# EAGLE board RGB_Tester (EAGLE 8.0.1)
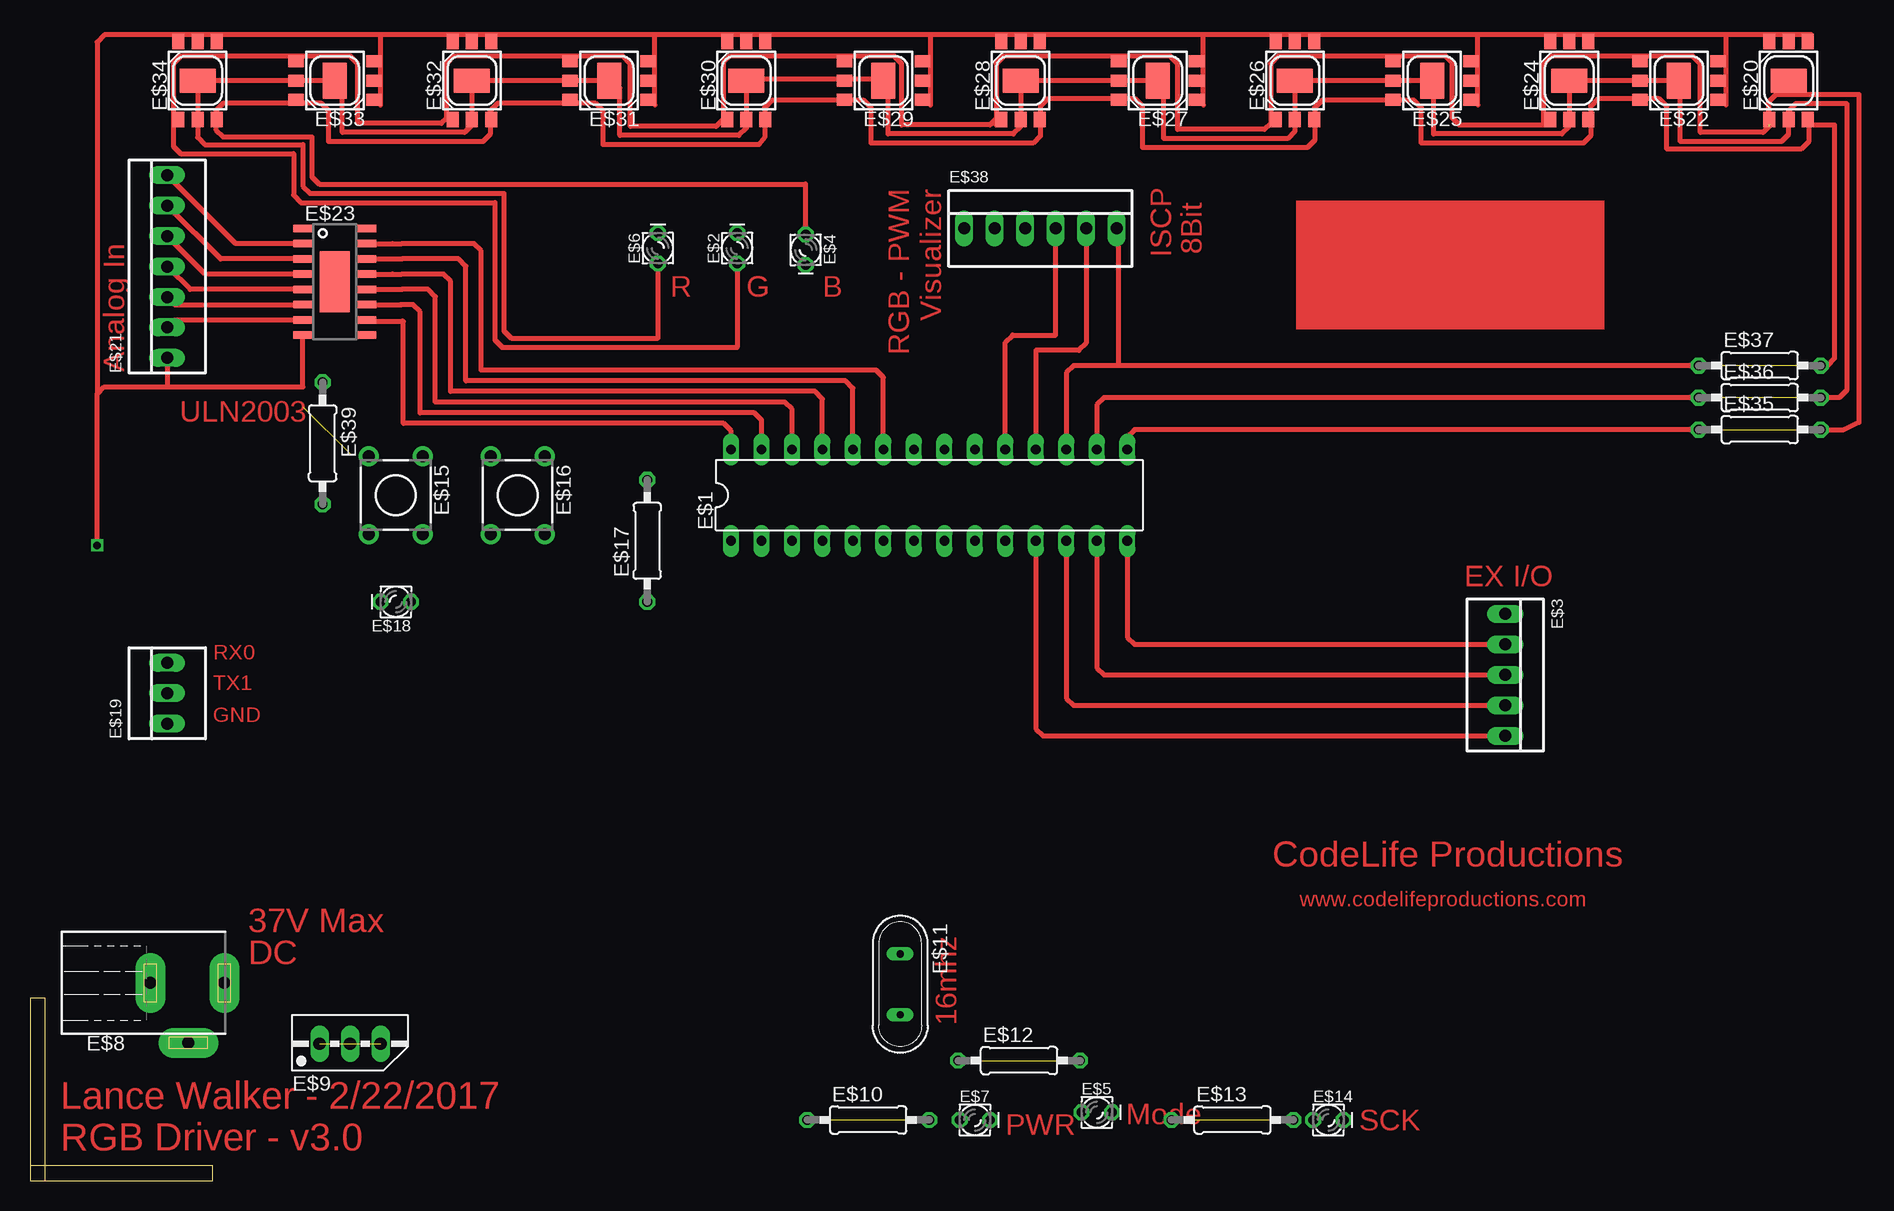
[diagram p0: board, top side]
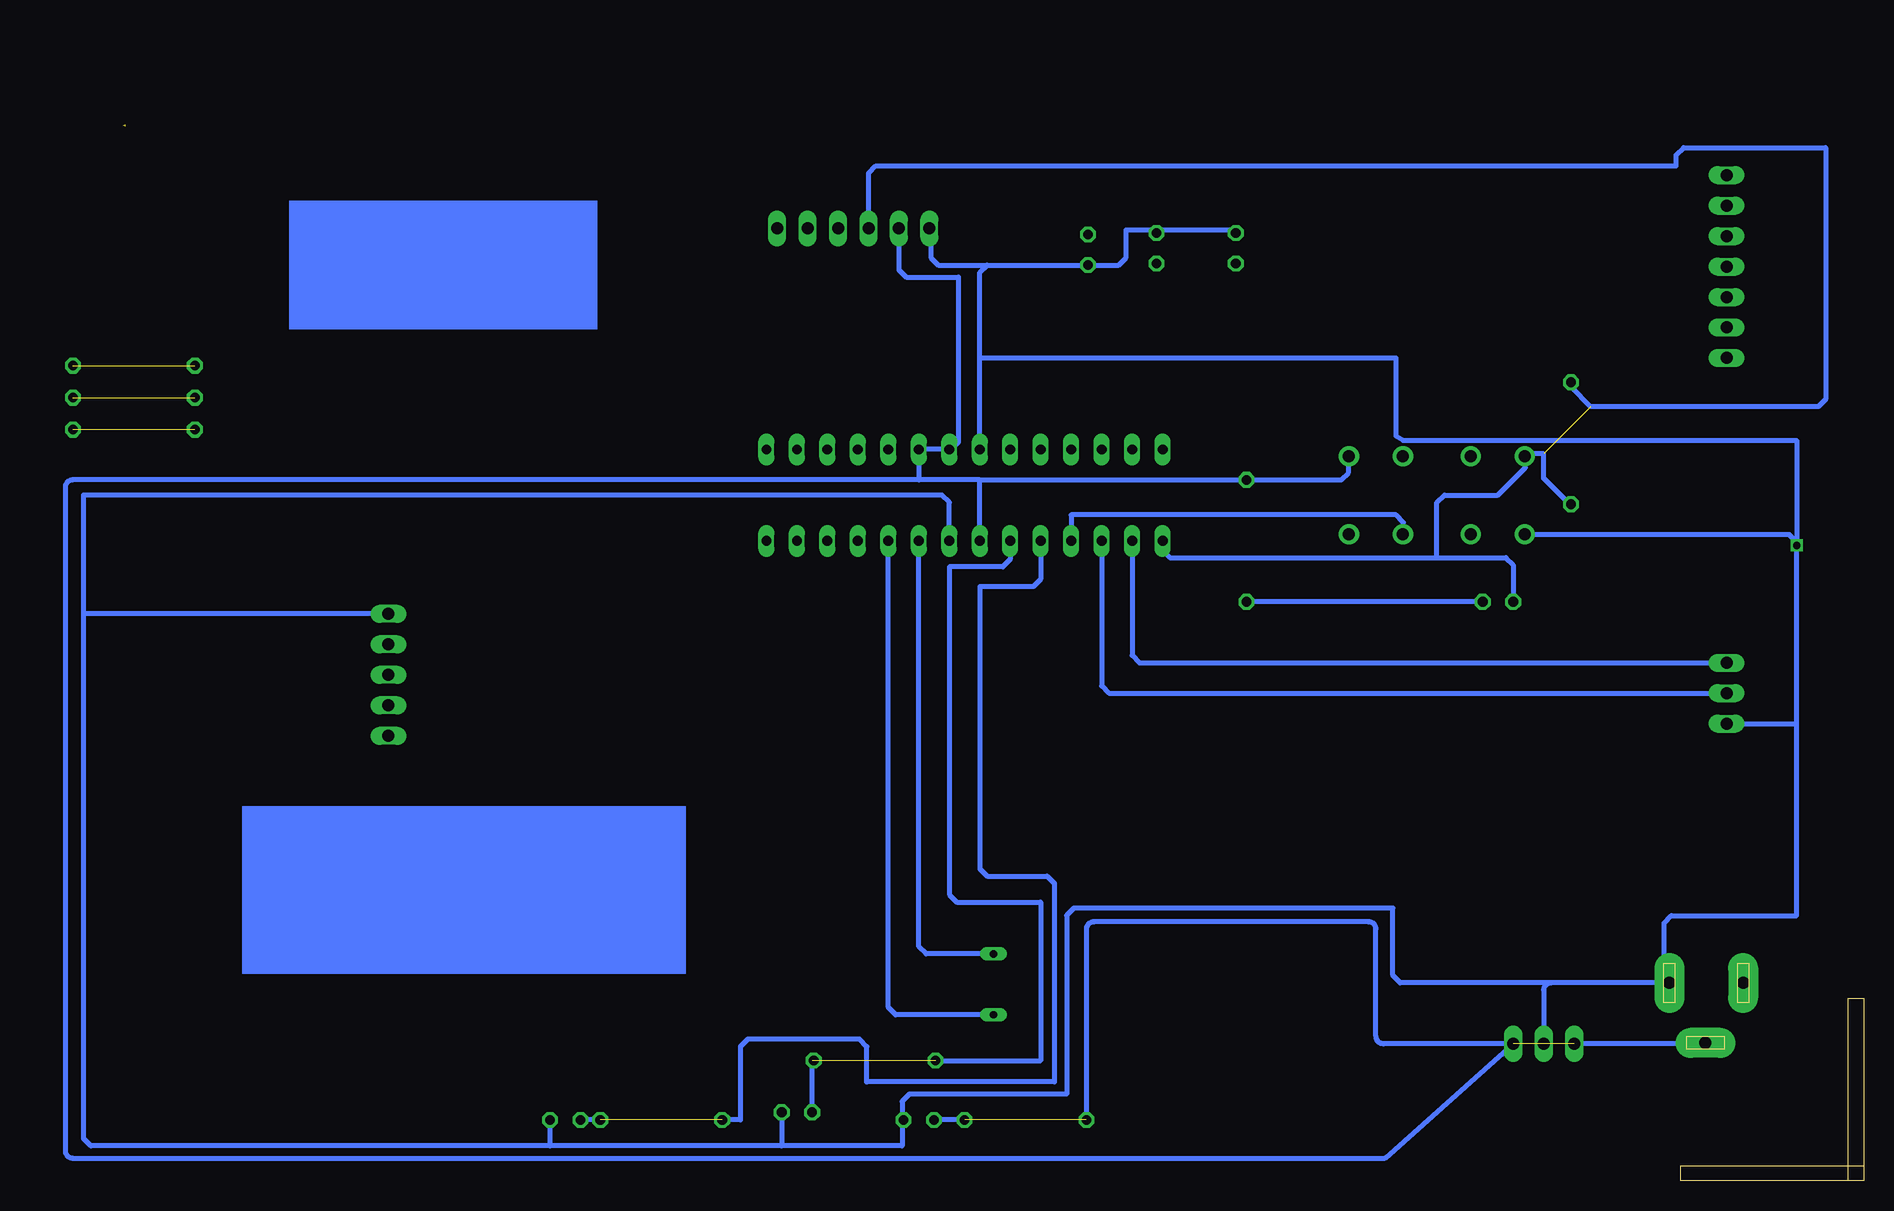
[diagram p1: board, bottom side, seen from below]

Size 15.24 x 15.24 mm. Coordinates in mm from the lower left corner, seen from the top.
Copper layers (1*16): Top 0.035mm / dielectric 1.5mm / Bottom 0.035mm
Design rules "default": minimum track width 10mil, minimum drill 24mil, track to track 8mil, track to pad 8mil, pad to pad 8mil, via to via 8mil, smd to smd 8mil, copper to edge 40mil, drill to drill 8mil, minimum pad ring 10mil, minimum via ring 8mil, stop-mask expansion 4mil, vias tented up to drill 0mil, thermal gap 10mil
Milling: area 0,0 to 1.3,15.2; area 0,0 to 15.2,1.3

## Footprints (pad centres in the part's own frame; a part is rotated, then mirrored left to right if it is on the bottom)
DIL28-3 = drill 0.813 long: 1 -16.51,-3.81; 2 -13.97,-3.81; 3 -11.43,-3.81; 4 -8.89,-3.81; 5 -6.35,-3.81; 6 -3.81,-3.81; 7 -1.27,-3.81; 8 1.27,-3.81; 9 3.81,-3.81; 10 6.35,-3.81; 11 8.89,-3.81; 12 11.43,-3.81; 13 13.97,-3.81; 14 16.51,-3.81; 15 16.51,3.81; 16 13.97,3.81; 17 11.43,3.81; 18 8.89,3.81; 19 6.35,3.81; 20 3.81,3.81; 21 1.27,3.81; 22 -1.27,3.81; 23 -3.81,3.81; 24 -6.35,3.81; 25 -8.89,3.81; 26 -11.43,3.81; 27 -13.97,3.81; 28 -16.51,3.81
LED_LD260 = drill 0.813 octagon: A -1.27,0; K 1.27,0
22-23-2051 = drill 1 long: 1 -5.08,0; 2 -2.54,0; 3 0,0; 4 2.54,0; 5 5.08,0
733980-62 = drill 1 pad 2.5 long: 1 0,8.57; 2 0,2.42; 3 5,5.57
78MXXS = drill 1.016 long: GND 0,-2.54; IN -2.54,-2.54; OUT 2.54,-2.54
0207/10 = drill 0.813 octagon: 1 -5.08,0; 2 5.08,0
QS = drill 0.61 long: 1 -2.54,0; 2 2.54,0
TL1105 = drill 1 pad 1.676: 1 -2.25,3.25; 2 2.25,3.25; 3 -2.25,-3.25; 4 2.25,-3.25
22-23-2031 = drill 1 long: 1 -2.54,0; 2 0,0; 3 2.54,0
LP2C63-ST-RGB-SR0 = smd 1.3 x 1: 1 -3.25,1.6; 2 -3.25,0; 3 -3.25,-1.6; 4 3.25,-1.6; 5 3.25,0; 6 3.25,1.6 | smd 2 x 3: TH 0,0
22-23-2071 = drill 1 long: 1 -7.62,0; 2 -5.08,0; 3 -2.54,0; 4 0,0; 5 2.54,0; 6 5.08,0; 7 7.62,0
SOIC16 = smd 0.635 x 1.524: 1 -4.445,-2.695; 2 -3.175,-2.695; 3 -1.905,-2.695; 4 -0.635,-2.695; 5 0.635,-2.695; 6 1.905,-2.695; 7 3.175,-2.695; 8 4.445,-2.695; 9 4.445,2.695; 10 3.175,2.695; 11 1.905,2.695; 12 0.635,2.695; 13 -0.635,2.695; 14 -1.905,2.695; 15 -3.175,2.695; 16 -4.445,2.695 | smd 5.1 x 2.5: THERM 0,0
22-23-2061 = drill 1 long: 1 -6.35,0; 2 -3.81,0; 3 -1.27,0; 4 1.27,0; 5 3.81,0; 6 6.35,0

## Placement (x,y rotation side)
E$1  [DIL28-3]  74.93,57.15 0 top  (outside the outline)
E$2  [LED_LD260]  58.93,77.72 90 top  (outside the outline)
E$3  [22-23-2051]  122.94,42.16 270 top  (outside the outline)
E$4  [LED_LD260]  64.64,77.6 270 top  (outside the outline)
E$5  [LED_LD260]  88.9,5.71 0 top  (outside the outline)
E$6  [LED_LD260]  52.32,77.72 90 top  (outside the outline)
E$7  [LED_LD260]  78.74,5.08 0 top  (outside the outline)
E$8  [733980-62]  7.62,16.51 270 top
E$9  [78MXXS]  26.67,13.97 0 top  (outside the outline)
E$10  [0207/10]  69.85,5.08 0 top  (outside the outline)
E$11  [QS]  72.52,16.38 270 top  (outside the outline)
E$12  [0207/10]  82.42,10.03 0 top  (outside the outline)
E$13  [0207/10]  100.2,5.08 0 top  (outside the outline)
E$14  [LED_LD260]  108.2,5.08 0 top  (outside the outline)
E$15  [TL1105]  30.48,57.15 180 top  (outside the outline)
E$16  [TL1105]  40.64,57.15 180 top  (outside the outline)
E$17  [0207/10]  51.44,53.34 90 top  (outside the outline)
E$18  [LED_LD260]  30.48,48.26 180 top  (outside the outline)
E$19  [22-23-2031]  11.43,40.64 90 top  (outside the outline)
E$20  [LP2C63-ST-RGB-SR0]  146.56,91.69 90 top  (outside the outline)
E$21  [22-23-2071]  11.43,76.2 90 top  (outside the outline)
E$22  [LP2C63-ST-RGB-SR0]  137.41,91.69 180 top  (outside the outline)
E$23  [SOIC16]  25.4,74.93 270 top  (outside the outline)
E$24  [LP2C63-ST-RGB-SR0]  128.27,91.69 90 top  (outside the outline)
E$25  [LP2C63-ST-RGB-SR0]  116.84,91.69 180 top  (outside the outline)
E$26  [LP2C63-ST-RGB-SR0]  105.41,91.69 90 top  (outside the outline)
E$27  [LP2C63-ST-RGB-SR0]  93.98,91.69 180 top  (outside the outline)
E$28  [LP2C63-ST-RGB-SR0]  82.55,91.69 90 top  (outside the outline)
E$29  [LP2C63-ST-RGB-SR0]  71.12,91.69 180 top  (outside the outline)
E$30  [LP2C63-ST-RGB-SR0]  59.69,91.69 90 top  (outside the outline)
E$31  [LP2C63-ST-RGB-SR0]  48.26,91.69 180 top  (outside the outline)
E$32  [LP2C63-ST-RGB-SR0]  36.83,91.69 90 top  (outside the outline)
E$33  [LP2C63-ST-RGB-SR0]  25.4,91.69 180 top  (outside the outline)
E$34  [LP2C63-ST-RGB-SR0]  13.97,91.69 90 top  (outside the outline)
E$35  [0207/10]  144.14,62.61 0 top  (outside the outline)
E$36  [0207/10]  144.14,65.28 0 top  (outside the outline)
E$37  [0207/10]  144.14,67.95 0 top  (outside the outline)
E$38  [22-23-2061]  84.2,79.38 0 top  (outside the outline)
E$39  [0207/10]  24.38,61.47 270 top  (outside the outline)

## Library data of the parts
E$1 = fairchild-semic
E$2 E$4-E$7 E$10 E$12-E$14 E$17 E$18 E$35-E$37 E$39 = eagle-ltspice
E$3 E$19 E$21 E$38 = con-molex
E$8 = con-conrad
E$9 = v-reg
E$11 = special
E$15 E$16 = switch
E$20 E$22 E$24-E$34 = led
E$23 = cirrus-logic

## Nets
A00: E$1.23
A02: E$1.25
A04: E$1.27
A05: E$1.28
AO1: E$1.24
AO3: E$1.26
BLUE: E$4.A E$37.1 E$37.2
GND: E$1.8 E$1.22 E$3.1 E$5.K E$9.GND E$14.K E$19.1 E$38.1
GREEN: E$2.A E$35.1
IN00: E$21.7
IN02: E$21.5
IN04: E$21.3
IN05: E$21.2
MODE: E$1.4
MODE_LED: E$1.6 E$5.A E$12.1
MOSI: E$1.18 E$38.5
PWR: E$1.7 E$1.20 E$1.21 E$7.A E$9.IN E$9.OUT E$10.1 E$10.2 E$38.2
RED: E$6.A E$36.1 E$36.2
RESET: E$1.1 E$18.K E$38.3 E$39.1
RX: E$1.2
S$1: E$17.1 E$18.A
S$2: E$1.11 E$3.5
S$3: E$1.15
S$4: E$1.12 E$3.4
S$5: E$1.13 E$3.3
S$6: E$1.14 E$3.2
SCK: E$1.19 E$38.4
SCK_MODE: E$1.5 E$13.1 E$13.2
TX: E$1.3 E$19.2
XTAL1: E$1.9 E$11.1
XTAL2: E$1.10 E$11.2

## Tracks (layer width: path | path; a pad name or v marks a point on that pad's centre or on a via)
A00
  Top 0.406: E$1.23 71.12,66.95 70.51,67.56 37.59,67.56 37.59,77.5 36.98,78.11 30.99,78.11 30.23,78.11 28.07,78.11
A02
  Top 0.406: E$1.25 66.04,65.18 65.43,65.79 35.05,65.79 35.05,74.96 34.44,75.57 30.99,75.57 30.23,75.57 28.07,75.57
A04
  Top 0.406: E$1.27 60.96,63.4 60.35,64.01 32.51,64.01 32.51,72.42 31.9,73.03 30.99,73.03 30.86,73.03 28.07,73.03
A05
  Top 0.406: E$1.28 58.42,62.51 57.81,63.12 31.11,63.12 31.11,71.63 30.99,71.63 30.86,71.63 27.94,71.63
AO1
  Top 0.406: E$1.24 68.58,66.06 67.97,66.68 36.32,66.68 36.32,76.23 35.71,76.84 30.99,76.84 30.35,76.84 28.07,76.84
AO3
  Top 0.406: E$1.26 63.5,64.29 62.89,64.9 33.78,64.9 33.78,73.69 33.17,74.3 30.99,74.3 30.61,74.3 28.19,74.3
BLUE  (1 unrouted)
  Top 0.406: 148.21,88.52 148.21,88.01 | 148.21,88.01 148.21,86.59 147.6,85.98 136.4,85.98 136.4,89.56 135.79,90.17 130.66,90.17 130.05,89.56 130.05,87.1 129.44,86.49 115.95,86.49 115.95,89.43 115.34,90.04 107.67,90.04 107.06,89.43 107.06,86.72 106.45,86.11 92.71,86.11 92.71,89.56 92.1,90.17 84.81,90.17 84.2,89.56 84.2,87.1 83.59,86.49 70.1,86.49 70.1,89.43 69.49,90.04 61.82,90.04 61.21,89.43 61.21,86.97 60.73,86.36 47.75,86.36 47.75,89.18 47.14,89.79 38.96,89.79 38.35,89.18 38.35,87.22 37.74,86.61 24.89,86.61 24.89,89.18 24.28,89.79 16.1,89.79 15.49,89.18 15.49,87.61 16.1,87 23.49,87 23.49,83.67 24.11,83.06 64.64,83.06 E$4.A | E$37.2 149.76,67.95 150.37,68.56 150.37,88.01 148.21,88.01 | E$37.1 90.68,67.95 | 90.68,67.95 86.97,67.95 86.36,67.34 86.36,60.83 | 90.68,79.38 90.68,67.95
GND  (via drill 0.6)
  Top 0.406: 5.59,52.83 v5.59,52.96 5.59,65.56 | 5.59,65.56 6.2,66.17 11.43,66.17 | 11.43,66.17 22.73,66.17 22.73,70.48 | 11.43,68.45 11.43,66.17 | 148.46,95.5 141.35,95.5 | 141.35,95.5 120.65,95.5 | 120.65,95.5 97.79,95.5 | 97.79,95.5 75.06,95.5 | 75.06,95.5 52.07,95.5 | 52.07,95.5 29.21,95.5 | 29.21,95.5 6.2,95.5 5.59,94.89 5.59,65.56 | 29.21,89.66 29.21,95.5 | 52.07,89.66 52.07,95.5 | 75.06,89.66 75.06,95.5 | 97.79,89.66 97.79,95.5 | 120.65,89.66 120.65,95.5 | 141.35,89.66 141.35,95.5
  Bottom 0.406: E$9.GND 26.67,15.9 arc90 26.06,16.51 | 26.06,16.51 38.63,16.51 39.24,17.12 39.24,22.73 65.81,22.73 66.42,22.12 66.42,7.24 79.53,7.24 80.14,6.63 80.14,2.92 90.17,2.92 | 16.51,16.51 16.64,16.51 | 16.64,16.51 26.06,16.51 | 90.17,2.92 109.47,2.92 | 109.47,2.92 147.73,2.92 148.34,3.53 148.34,47.24 | 148.34,47.24 148.34,57.15 76.81,57.15 76.2,56.54 E$1.8 | E$5.K 90.17,2.92 | 16.64,16.51 16.64,21.49 16.03,22.1 5.59,22.1 5.59,38.1 | 5.59,38.1 v5.59,52.96 | v5.59,52.96 5.59,53.24 6.2,53.85 28.19,53.85 | E$14.K 109.47,2.92 | E$19.1 5.59,38.1 | 73.66,68.58 38.99,68.58 38.99,62.08 38.38,61.72 5.59,61.72 v5.59,52.96 | E$1.22 73.66,68.58 | 73.66,68.58 73.66,75.72 73.05,76.33 | 73.05,76.33 62.08,76.33 61.47,76.94 61.47,79.25 52.2,79.25 | E$3.1 148.34,47.24 | 73.05,76.33 77.11,76.33 77.72,76.94 77.72,79.38 E$38.1
GREEN  (3 unrouted)
  Top 0.406: 145.03,88.39 145.03,87.99 144.42,87.38 139.19,87.38 139.19,93.12 138.58,93.73 126.72,93.73 126.11,93.12 126.11,88.01 119.1,88.01 118.49,88.62 118.49,93.22 117.98,93.73 103.99,93.73 103.38,93.12 103.38,88.11 | 144.91,88.01 144.91,89.94 145.52,90.55 152.4,90.55 152.4,63.22 151.16,62.61 149.22,62.61 | 144.91,89.54 144.91,87.88 | 103.38,88.11 103.38,88.01 | 103.38,88.11 102.9,87.63 95.63,87.63 95.63,93.12 95.02,93.73 81.13,93.73 80.52,93.12 80.52,88.52 | 80.52,88.52 80.52,88.01 | 80.52,88.52 80.01,88.01 72.64,88.01 72.64,93.12 72.03,93.73 58.29,93.73 57.78,93.22 57.78,88.49 | 57.78,88.49 57.78,88.01 | 57.78,88.49 57.17,87.88 50.04,87.88 50.04,93.12 49.43,93.73 35.28,93.73 34.67,93.12 34.67,88.52 34.29,88.14 27.3,88.14 27.3,93.12 26.7,93.73 12.55,93.73 11.94,93.12 11.94,86.21 12.55,85.6 21.97,85.6 21.97,82.14 22.58,81.53 38.73,81.53 38.73,70.08 39.34,69.47 58.93,69.47 E$2.A | E$35.1 92.08,62.61 91.95,62.48
IN00
  Top 0.406: 22.73,78.11 17.14,78.11 E$21.7
IN01
  Top 0.406: 22.73,76.84 15.88,76.84 11.56,81.15
IN02
  Top 0.406: 22.73,75.57 14.61,75.57 E$21.5
IN03
  Top 0.406: 22.73,74.3 13.34,74.3 11.56,76.07
IN04
  Top 0.406: E$21.3 11.43,73.64 12.04,73.03 22.73,73.03
IN05
  Top 0.406: E$21.2 11.43,71.15 12.04,71.76 22.73,71.76
MODE
  Bottom 0.406: 38.35,53.72 38.35,54.89 38.96,55.5 66.04,55.5 E$1.4
MODE_LED  (1 unrouted)
  Bottom 0.406: E$1.6 71.12,51.79 71.73,51.18 76.2,51.18 76.2,23.85 75.59,23.24 68.58,23.24 68.58,10.03 E$12.1 | E$5.A 87.63,10.03
MOSI
  Top 0.406: E$38.5 88.01,69.83 87.4,69.22 83.82,69.22 E$1.18
PWR  (2 unrouted)
  Bottom 0.406: 12.7,11.43 E$9.IN | E$1.7 73.66,58.42 | 73.66,58.42 78.74,58.42 | 78.74,58.42 149.25,58.42 arc-90 149.86,57.81 149.86,2.52 arc-90 149.25,1.91 39.88,1.91 E$9.OUT 40.03,11.43 arc90 40.64,12.04 40.64,20.98 arc-90 41.25,21.59 64.16,21.59 arc-90 64.77,20.98 E$10.1 | E$10.2 E$7.A | 73.66,58.42 43.54,58.42 42.93,59.03 42.93,60.45 | 78.74,58.42 E$1.20 E$1.21 76.05,60.96 75.44,61.57 75.44,64.11 75.44,64.39 75.44,75.31 79.78,75.31 80.39,75.92 E$38.2
RED  (1 unrouted)
  Top 0.406: E$36.2 150.77,65.28 151.38,65.89 151.38,89.79 147.17,89.79 146.56,89.18 146.56,87.22 145.95,86.61 137.54,86.61 137.54,91.08 136.93,91.69 128.88,91.69 128.27,91.08 128.27,87.86 127.66,87.25 116.97,87.25 116.97,91.08 116.36,91.69 106.02,91.69 105.41,91.08 105.41,87.48 104.8,86.87 94.49,86.87 94.49,91.08 93.88,91.69 83.16,91.69 82.55,91.08 82.55,87.86 81.94,87.25 71.5,87.25 71.5,91.21 70.89,91.82 60.3,91.82 59.69,91.21 59.69,87.73 59.08,87.12 49.15,87.12 49.15,91.08 48.54,91.69 37.44,91.69 36.83,91.08 36.83,87.99 36.22,87.38 26.04,87.38 26.04,91.08 25.43,91.69 14.58,91.69 13.97,91.08 13.97,86.97 14.58,86.36 22.73,86.36 22.73,82.91 23.34,82.3 39.5,82.3 39.5,70.84 40.11,70.23 52.32,70.23 E$6.A | E$36.1 89.51,65.28 88.9,64.67 88.9,60.83
RESET  (1 unrouted)
  Bottom 0.406: E$1.1 58.42,52.55 57.81,51.94 35.56,51.94 | 35.56,51.94 35.56,56.54 34.95,57.15 30.48,57.15 28.19,59.44 28.19,60.2 28.19,60.45 28.19,60.58 26.67,60.58 26.67,58.55 24.38,56.26 | 35.56,51.94 29.82,51.94 29.21,51.33 E$18.K | E$38.3 82.93,83.97 82.32,84.58 15.62,84.58 15.62,85.5 15.01,86.11 3.17,86.11 3.17,65.13 3.79,64.52 22.73,64.52 24.38,66.17 E$39.1
RX
  Bottom 0.406: E$1.2 60.96,43.79 60.35,43.18 11.43,43.18
S$1
  Bottom 0.406: E$18.A E$17.1
S$2
  Top 0.406: E$1.11 83.82,37.69 84.43,37.08 E$3.5
S$3
  Top 0.406: E$1.15 91.44,62 92.05,62.61
S$4
  Top 0.406: E$1.12 86.36,40.23 86.97,39.62 E$3.4
S$5
  Top 0.406: E$1.13 88.9,42.77 89.51,42.16 E$3.3
S$6
  Top 0.406: E$1.14 91.44,45.31 92.05,44.7 E$3.2
SCK
  Top 0.406: E$1.19 81.28,69.88 81.89,70.48 85.47,70.48 E$38.4
SCK_MODE  (1 unrouted)
  Bottom 0.406: E$1.5 68.58,50.14 69.19,49.53 73.66,49.53 73.66,26.01 73.05,25.4 68.05,25.4 67.44,24.79 67.44,8.25 83.06,8.25 | 83.06,8.25 83.08,8.25 | 83.06,8.25 83.06,11.2 83.67,11.81 92.99,11.81 93.6,11.2 93.6,5.08 E$13.1 | E$13.2 106.93,5.08
TX
  Bottom 0.406: E$1.3 63.5,41.25 62.89,40.64 E$19.2
XTAL1
  Bottom 0.406: E$11.1 78.13,18.92 78.74,19.53 E$1.9
XTAL2
  Bottom 0.406: E$11.2 80.67,13.84 81.28,14.45 E$1.10
(copper drawn outside any net)
  shapes: Bottom area x2, Top area x1

## Text on the board
Top: RGB - PWM / Visualizer | 8Bit | ISCP | R | G | B | Analog In | ULN2003 | EX I/O | RX0 | TX1 | GND | CodeLife Productions | www.codelifeproductions.com | 37V Max | DC | 16mhz | Mode | SCK | PWR | Lance Walker - 2/22/2017 / RGB Driver - v3.0